# EAGLE board ledrampsesquema (EAGLE 7.6.0)
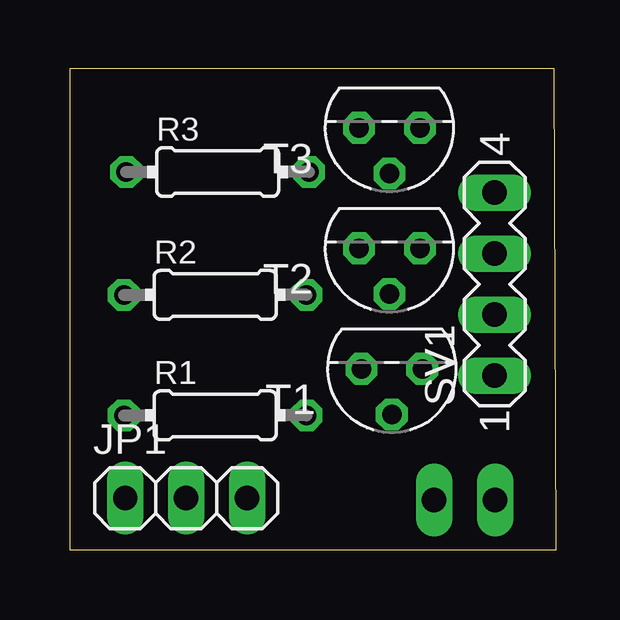
[diagram p0: board, top side]
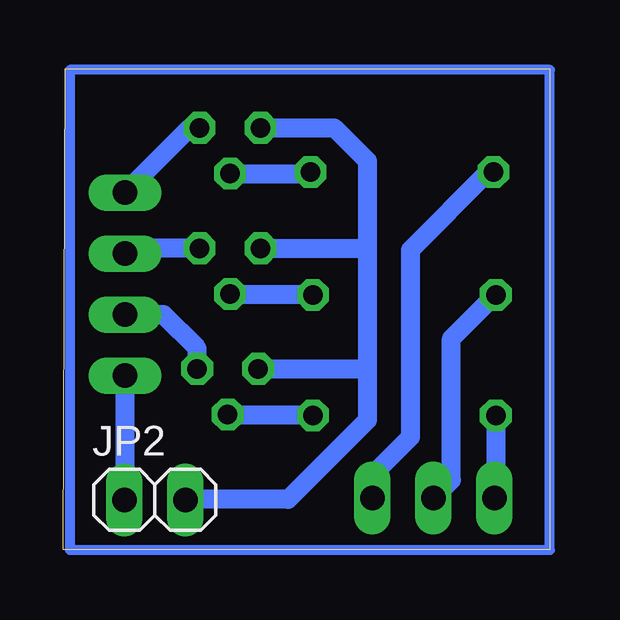
[diagram p1: board, bottom side, seen from below]

Size 20.28 x 20.05 mm. Coordinates in mm from the lower left corner, seen from the top.
Outline: 0,0 20.28,0 20.18,20.05 0,20.05 0,0
Copper layers (1*16): Top 0.035mm / dielectric 1.5mm / Bottom 0.035mm
Design rules "default": minimum track width 10mil, minimum drill 24mil, track to track 8mil, track to pad 8mil, pad to pad 8mil, via to via 8mil, smd to smd 8mil, copper to edge 40mil, drill to drill 8mil, minimum pad ring 10mil, minimum via ring 8mil, stop-mask expansion 4mil, vias tented up to drill 0mil, thermal gap 10mil

## Footprints (pad centres in the part's own frame; a part is rotated, then mirrored left to right if it is on the bottom)
1X03 = drill 1.016 long: 1 -2.54,0; 2 0,0; 3 2.54,0
1X02 = drill 1.016 long: 1 -1.27,0; 2 1.27,0
0204/7 = drill 0.813 octagon: 1 -3.81,0; 2 3.81,0
MA04-1 = drill 1.016 long: 1 -3.81,0; 2 -1.27,0; 3 1.27,0; 4 3.81,0
TO92 = drill 0.813 octagon: 1 1.27,0; 2 0,1.905; 3 -1.27,0

## Placement (x,y rotation side)
JP1  [1X03]  4.85,2.15 0 top
JP2  [1X02]  16.45,2.08 0 bottom
R1  8k2  [0204/7]  6.06,5.6 0 top
R2  8k2  [0204/7]  6.06,10.62 0 top
R3  8k2  [0204/7]  6.16,15.74 0 top
SV1  [MA04-1]  17.7,11.07 90 top
T1  BC547  [TO92]  13.42,7.54 180 top
T2  BC547  [TO92]  13.32,12.56 180 top
T3  BC547  [TO92]  13.32,17.58 180 top

## Library data of the parts
JP1 JP2 = pinhead
R1-R3 = eagle-ltspice; SPICEMODEL: NONE; SPICEPREFIX: R
SV1 = con-lstb; OC_FARNELL: unknown; OC_NEWARK: unknown
T1-T3 = transistor

## Nets
GND: JP2.2 T1.1 T2.1 T3.1
N$1: R1.2 T1.2
N$2: JP1.1 R1.1
N$3: SV1.2 T1.3
N$4: SV1.3 T2.3
N$5: SV1.4 T3.3
N$6: R2.2 T2.2
N$7: R3.2 T3.2
N$8: JP1.2 R2.1
N$9: JP1.3 R3.1
VCC: JP2.1 SV1.1

## Tracks (layer width: path | path; a pad name or v marks a point on that pad's centre or on a via)
GND
  Bottom 0.8: T3.1 8.98,17.58 7.6,16.2 7.6,12.4 | 7.6,12.4 7.6,7.5 | 7.6,7.5 7.6,5.4 10.9,2.1 15.16,2.1 JP2.2 | T1.1 7.64,7.54 7.6,7.5 | T2.1 7.76,12.56 7.6,12.4
N$1
  Bottom 0.8: T1.2 9.9,5.63 R1.2
N$2
  Bottom 0.8: R1.1 2.25,2.21 JP1.1
N$3
  Bottom 0.8: T1.3 14.69,8.39 16.1,9.8 SV1.2
N$4
  Bottom 0.8: T2.3 17.48,12.56 SV1.3
N$5
  Bottom 0.8: T3.3 15,17.58 SV1.4
N$6
  Bottom 0.8: T2.2 9.9,10.65 R2.2
N$7
  Bottom 0.8: T3.2 10.04,15.68 R3.2
N$8
  Bottom 0.8: JP1.2 4.1,2.9 4.1,8.8 2.28,10.62 R2.1
N$9
  Bottom 0.8: JP1.3 7.3,2.24 7.3,3.2 5.8,4.7 5.8,12.5 2.56,15.74 R3.1
N$10
  Bottom 0.406: 0,20 20,20 20,0 0,0 0,20
VCC
  Bottom 0.8: SV1.1 17.7,2.86 JP2.1